# Altium PCB MergeRev4_0.PcbDoc
Units mil, origin at the board's own origin, x right, y up, seen from the top; angles counter-clockwise.
Board outline 6000 x 4000 mil, 2 copper layers (Top Layer, Bottom Layer); 45 components, 44 nets, 278 pads, 14 vias.
Unrouted connection lines stored in the file: 140.
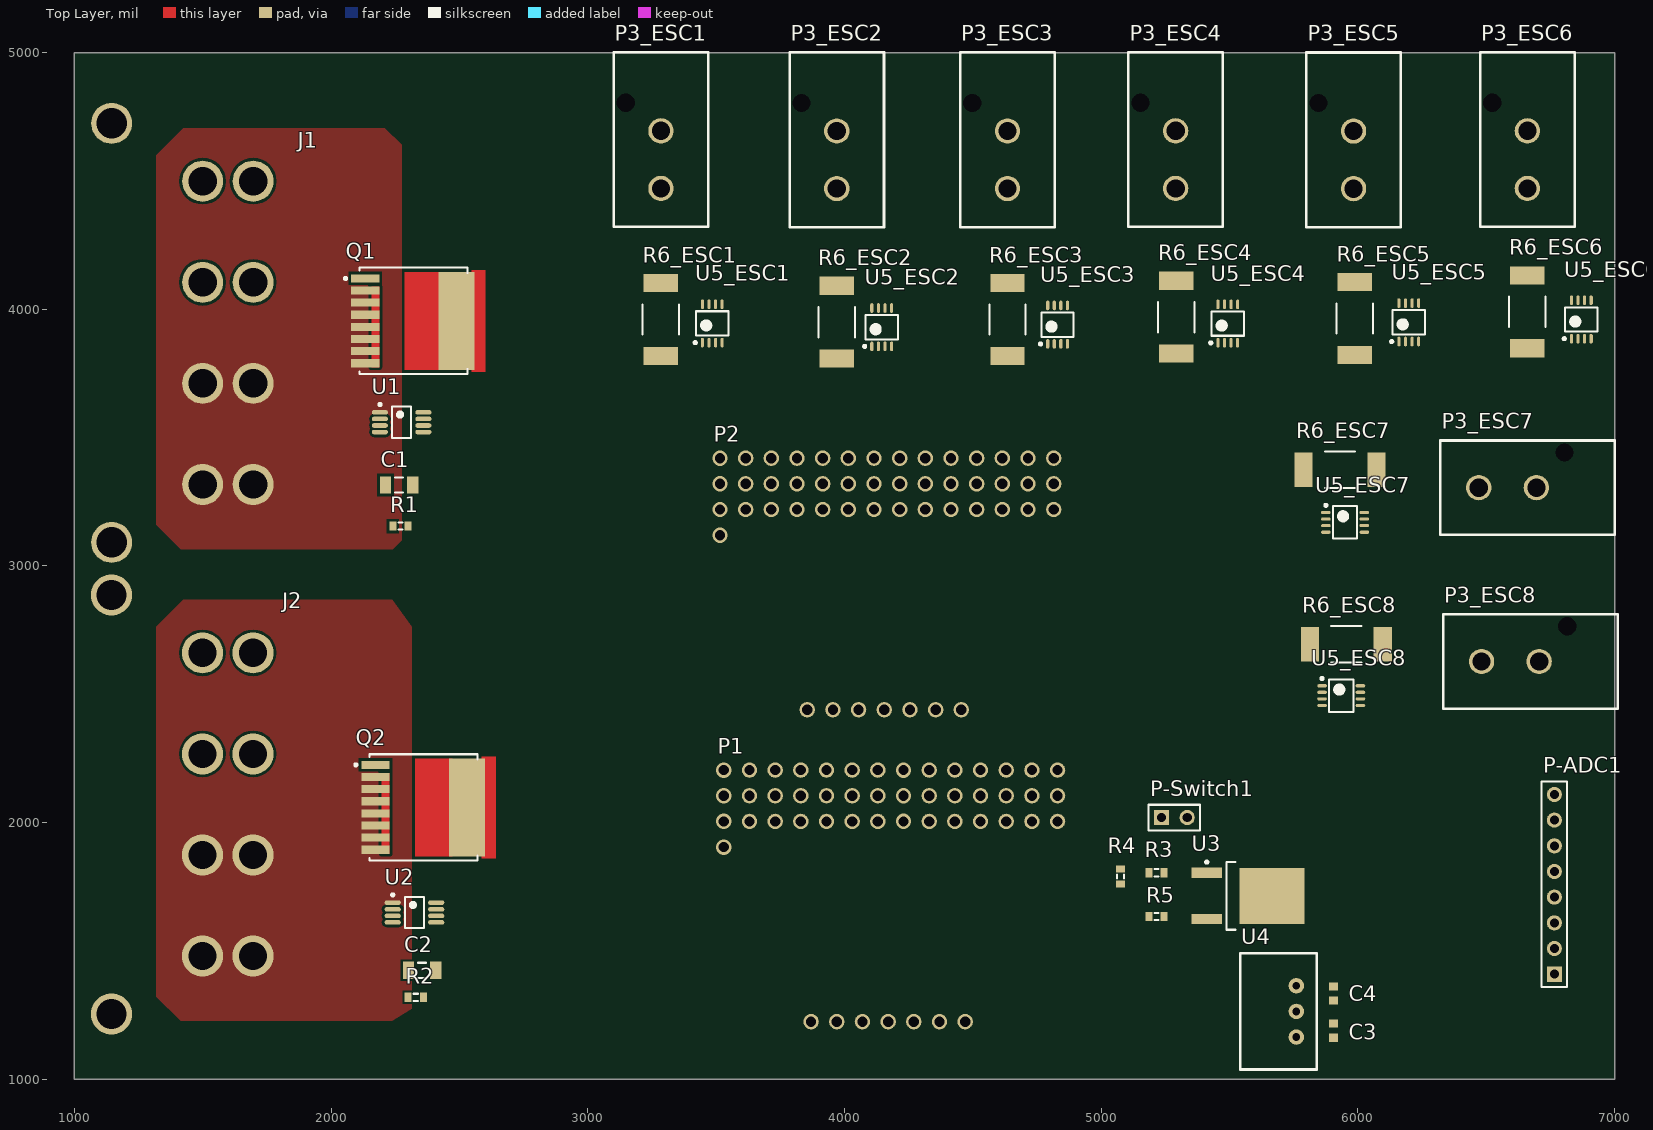
[diagram p0: Top Layer view]
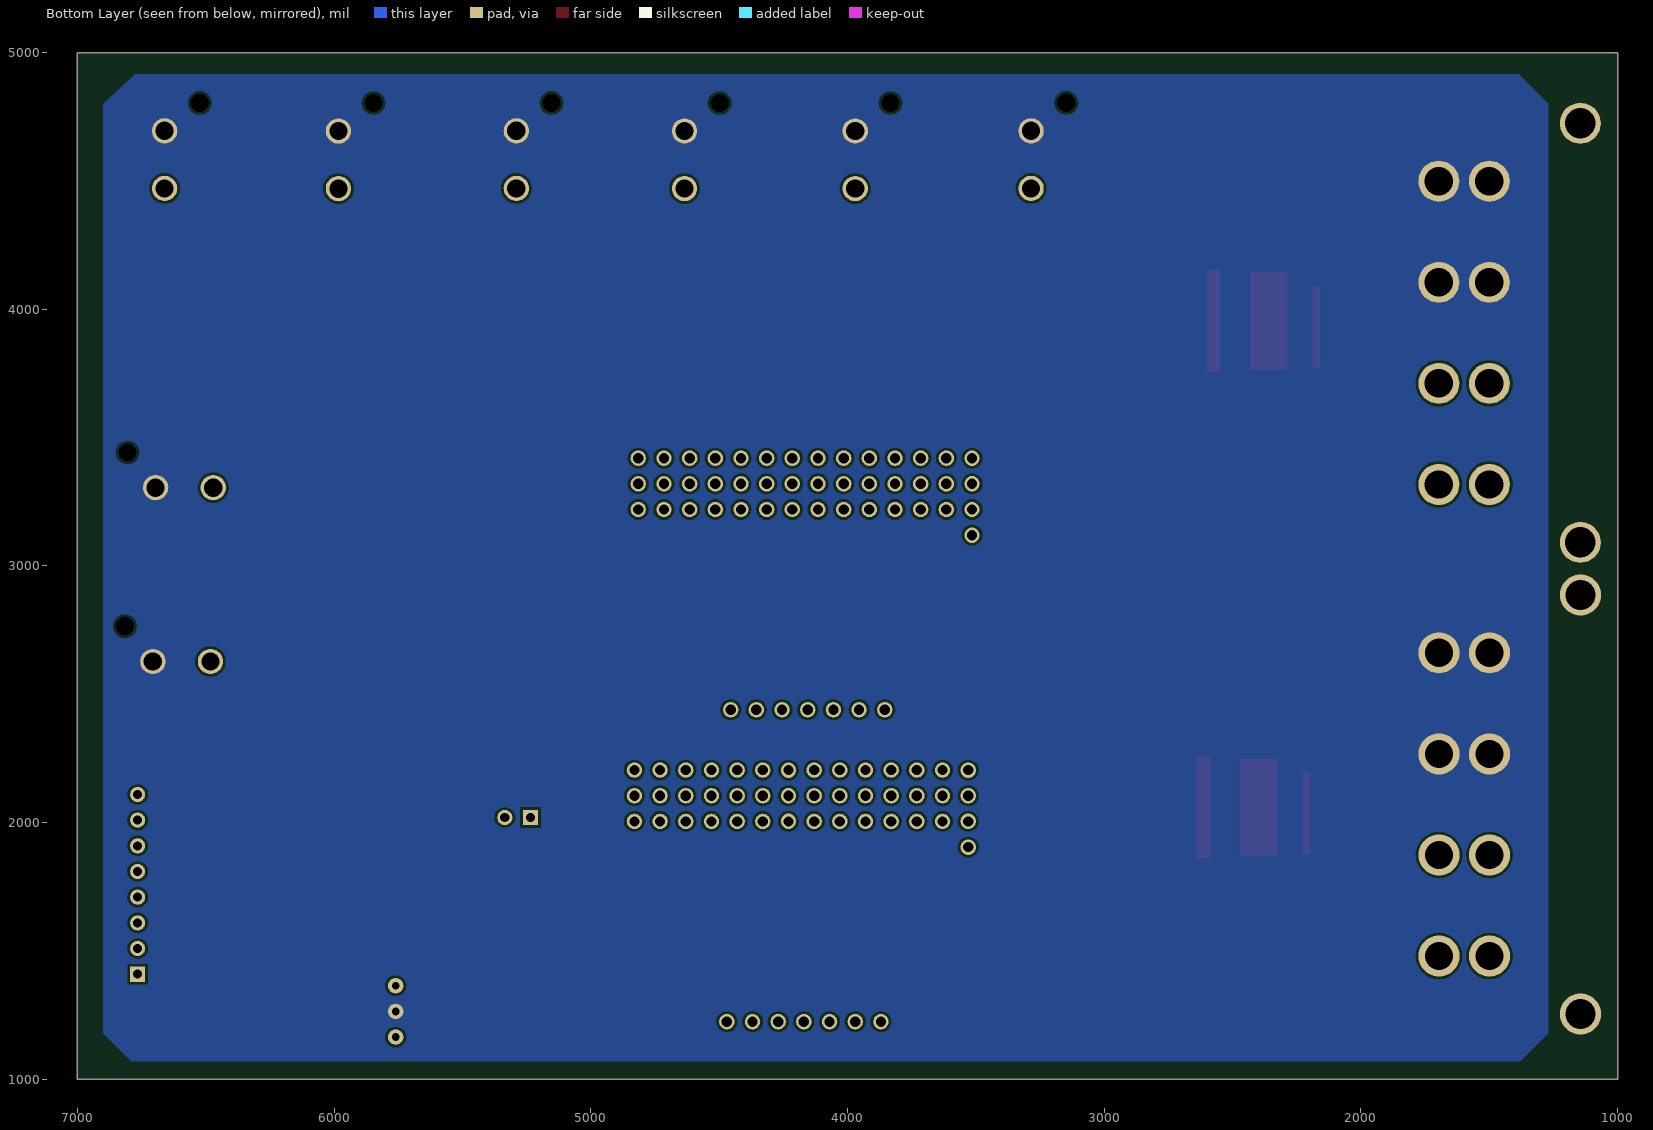
[diagram p1: Bottom Layer view, seen from below]

## Layer stack, top to bottom
Top Solder: solder mask 0.4, Solder Resist, Dk 3.5
Top Layer: signal copper 1.4
Dielectric 1: dielectric 12.6, FR-4, Dk 4.8
Bottom Layer: signal copper 1.4
Bottom Solder: solder mask 0.4, Solder Resist, Dk 3.5

## Board outline
1000,1000 7000,1000 7000,5000 1000,5000

## Design rules (kind name [scope] priority, off if disabled: settings)
Clearance [All] p1: gap=10 ignorepadtopadclearanceinfootprint=FALSE except(0: Arc-Hole Track-Hole SMDPad-Hole THPad-Hole Via-Hole Fill-Hole Poly-Hole Region-Hole Text-Hole)
PolygonConnect PolygonConnect_5 [All vs IsNamedPolygon('Ground Pour')] p1: thpad.connectstyle=Direct thpad.reliefconductorwidth=10 thpad.reliefentries=4 thpad.polygonreliefangle="90 Angle" thpad.airgapwidth=10 smdpad.connectstyle=Direct smdpad.reliefconductorwidth=10 smdpad.reliefentries=4 smdpad.polygonreliefangle="90 Angle" smdpad.airgapwidth=10 via.connectstyle=Relief via.reliefconductorwidth=10 via.reliefentries=4 via.polygonreliefangle="90 Angle" via.airgapwidth=10
PolygonConnect PolygonConnect_4 [All vs IsNamedPolygon('Ground Pour')] p2: thpad.connectstyle=Direct thpad.reliefconductorwidth=10 thpad.reliefentries=4 thpad.polygonreliefangle="90 Angle" thpad.airgapwidth=10 smdpad.connectstyle=Direct smdpad.reliefconductorwidth=10 smdpad.reliefentries=4 smdpad.polygonreliefangle="90 Angle" smdpad.airgapwidth=10 via.connectstyle=Relief via.reliefconductorwidth=10 via.reliefentries=4 via.polygonreliefangle="90 Angle" via.airgapwidth=10
PolygonConnect PolygonConnect_3 [All vs IsNamedPolygon('Top Layer-No Net')] p3: thpad.connectstyle=Direct thpad.reliefconductorwidth=10 thpad.reliefentries=4 thpad.polygonreliefangle="90 Angle" thpad.airgapwidth=10 smdpad.connectstyle=Direct smdpad.reliefconductorwidth=10 smdpad.reliefentries=4 smdpad.polygonreliefangle="90 Angle" smdpad.airgapwidth=10 via.connectstyle=Relief via.reliefconductorwidth=10 via.reliefentries=4 via.polygonreliefangle="90 Angle" via.airgapwidth=10
PolygonConnect PolygonConnect_2 [All vs IsNamedPolygon('Top Layer-No Net')] p4: thpad.connectstyle=Direct thpad.reliefconductorwidth=10 thpad.reliefentries=4 thpad.polygonreliefangle="90 Angle" thpad.airgapwidth=10 smdpad.connectstyle=Direct smdpad.reliefconductorwidth=10 smdpad.reliefentries=4 smdpad.polygonreliefangle="90 Angle" smdpad.airgapwidth=10 via.connectstyle=Relief via.reliefconductorwidth=10 via.reliefentries=4 via.polygonreliefangle="90 Angle" via.airgapwidth=10
PolygonConnect PolygonConnect_1 [All vs IsNamedPolygon('Top Layer-No Net')] p5: thpad.connectstyle=Relief thpad.reliefconductorwidth=10 thpad.reliefentries=4 thpad.polygonreliefangle="90 Angle" thpad.airgapwidth=10 smdpad.connectstyle=Direct smdpad.reliefconductorwidth=10 smdpad.reliefentries=4 smdpad.polygonreliefangle="90 Angle" smdpad.airgapwidth=10 via.connectstyle=Relief via.reliefconductorwidth=10 via.reliefentries=4 via.polygonreliefangle="90 Angle" via.airgapwidth=10
PolygonConnect [All] p6: connectstyle=Relief reliefconductorwidth=10 reliefentries=4 polygonreliefangle="90 Angle" airgapwidth=10
RoutingVias [All] p1: holewidth=28 width=50 viastyle="Through Hole" minholewidth=28 minwidth=50 maxholewidth=28 maxwidth=50
SolderMaskExpansion [All] p1: expansion=4
Width [All] p1: maxlimit=10 minlimit=10 preferedwidth=10
30 further rules are at their usual default settings.

## Classes and differential pairs
channel class ESCHeaders: ESC1 ESC2 ESC3 ESC4 ESC5 ESC6 ESC7 ESC8
component class ESC8: P3_ESC8 R6_ESC8 U5_ESC8
component class ESC7: P3_ESC7 R6_ESC7 U5_ESC7
component class ESC6: P3_ESC6 R6_ESC6 U5_ESC6
component class ESC5: P3_ESC5 R6_ESC5 U5_ESC5
component class ESC4: P3_ESC4 R6_ESC4 U5_ESC4
component class ESC3: P3_ESC3 R6_ESC3 U5_ESC3
component class ESC2: P3_ESC2 R6_ESC2 U5_ESC2
net class ADC[1..8]: ADC1 ADC2 ADC3 ADC4 ADC5 ADC6 ADC7 ADC8
component class ESC1: P3_ESC1 R6_ESC1 U5_ESC1
component class MergeRev4_0: C1 C2 C3 C4 J1 J2 P1 P2 P-ADC1 P-Switch1 Q1 Q2 R1 R2 R3 R4 R5 U1 U2 U3 U4

## Components (designator, comment, footprint, x,y, rotation, side; value= is the part's Value field where it differs from the comment)
C1 "Cap Semi" C1206 2265,3315 r0 top value=1uF
C2 "Cap Semi" C1206 2355,1425 r0 top value=1uF
C3 "Cap" 1608[0603] 5905,1190 r270 top value=100pF
C4 "Cap" 1608[0603] 5905,1335 r90 top value=100pF
J1 "Molex42820-4224" Molex42820-4224 1500,4498.7 r270 top
J2 "Molex42820-4224" Molex42820-4224 1499.33,2661.69 r270 top
P1 "Pololu Headers" "Pololu Headers" 4630,2105 r270 top
P2 "ESC Headers" "Pololu Headers" 4615,3320 r270 top
P3_ESC1 "Megafit Slim Vert 2 Peg" 76829-0102 3101.14,4320.59 r0 top (schematic designator P3)
P3_ESC2 "Megafit Slim Vert 2 Peg" 76829-0102 3786.14,4320 r0 top (schematic designator P3)
P3_ESC3 "Megafit Slim Vert 2 Peg" 76829-0102 4451.14,4320 r0 top (schematic designator P3)
P3_ESC4 "Megafit Slim Vert 2 Peg" 76829-0102 5106.14,4320.59 r0 top (schematic designator P3)
P3_ESC5 "Megafit Slim Vert 2 Peg" 76829-0102 5799.13,4319.65 r0 top (schematic designator P3)
P3_ESC6 "Megafit Slim Vert 2 Peg" 76829-0102 6476.14,4320.59 r0 top (schematic designator P3)
P3_ESC7 "Megafit Slim Vert 2 Peg" 76829-0102 6320.59,3488.86 r270 top (schematic designator P3)
P3_ESC8 "Megafit Slim Vert 2 Peg" 76829-0102 6331.54,2811.85 r270 top (schematic designator P3)
P-ADC1 "Header 8" HDR1X8 6765,1410 r90 top
P-Switch1 "Header 2" HDR1X2 5235,2020 r0 top
Q1 "IPT004N03L" INF-PG-HSOF-8-1_V 2340,3955 r0 top
Q2 "IPT004N03L" INF-PG-HSOF-8-1_V 2380,2060 r0 top
R1 "Res3" J1-0603 2270.47,3155 r0 top value=100Ohm
R2 "Res3" J1-0603 2330,1320 r0 top value=100Ohm
R3 "Res3" J1-0603 5215,1805 r0 top value=1K
R4 "Res3" J1-0603 5075,1790.47 r90 top value=100K
R5 "Res3" J1-0603 5215,1635 r0 top value=1K
R6_ESC1 "HCS2512" HCS2512FTL300CT-ND_DT 3285,3960 r90 top value=0.0003 (schematic designator R6)
R6_ESC2 "HCS2512" HCS2512FTL300CT-ND_DT 3970,3950 r90 top value=0.0003 (schematic designator R6)
R6_ESC3 "HCS2512" HCS2512FTL300CT-ND_DT 4635,3960 r90 top value=0.0003 (schematic designator R6)
R6_ESC4 "HCS2512" HCS2512FTL300CT-ND_DT 5292.99,3969.06 r90 top value=0.0003 (schematic designator R6)
R6_ESC5 "HCS2512" HCS2512FTL300CT-ND_DT 5987.99,3964.06 r90 top value=0.0003 (schematic designator R6)
R6_ESC6 "HCS2512" HCS2512FTL300CT-ND_DT 6660,3990 r90 top value=0.0003 (schematic designator R6)
R6_ESC7 "HCS2512" HCS2512FTL300CT-ND_DT 5930,3375 r0 top value=0.0003 (schematic designator R6)
R6_ESC8 "HCS2512" HCS2512FTL300CT-ND_DT 5955,2695 r0 top value=0.0003 (schematic designator R6)
U1 "LTC4357CMS8#PBF" LT-MS8-8_N 2275,3560 r0 top
U2 "LTC4357CMS8#PBF" LT-MS8-8_N 2325,1650 r0 top
U3 "IRLR6225TRPBFCT-ND" IRLR6225_DT 5572.48,1715 r0 top
U4 "R-78XX-1.0" R-785.0-1.0 5838.74,1038.62 r90 top
U5_ESC1 "AD8217" AD8217_DT 3485,3945 r90 top (schematic designator U5)
U5_ESC2 "AD8217" AD8217_DT 4145,3930 r90 top (schematic designator U5)
U5_ESC3 "AD8217" AD8217_DT 4830,3940 r90 top (schematic designator U5)
U5_ESC4 "AD8217" AD8217_DT 5492.99,3944.06 r90 top (schematic designator U5)
U5_ESC5 "AD8217" AD8217_DT 6197.99,3949.06 r90 top (schematic designator U5)
U5_ESC6 "AD8217" AD8217_DT 6870,3960 r90 top (schematic designator U5)
U5_ESC7 "AD8217" AD8217_DT 5950,3170 r0 top (schematic designator U5)
U5_ESC8 "AD8217" AD8217_DT 5935,2495 r0 top (schematic designator U5)

## Footprints (in the part's own frame and the unit in brackets; to place one, negate y for a bottom-side part, rotate by r counter-clockwise, add the part's x,y. Pads: shape width x height; smd on the part's side, far side on the other; paste and mask are expansions set on the pad)
1608[0603] [mm] "Chip Capacitor, Body 1.6x0.8mm, IPC High Density"
  rect 0.8x0.9 smd: 1(-0.7,0) 2(0.7,0)
  body extent -0.87,-0.48 0.87,0.48, height 1.3
76829-0102 [mm] "molex 2 circuit connector megafit slim"
  round 2.5 hole 1.8 mask+0.3: 1(4.67,3.81) 2(4.67,9.51)
  round 0 hole 1.8 unplated: ""(1.19,12.28)
  silkscreen extent 0,0 9.34,17.28, body extent 0.5,0.5 8.85,14.54, height 16.95
AD8217_DT [mm] "MSOP, 8-Leads, 3.00mm x 3.00mm"
  oval 0.95x0.32 smd: 1(-1.9,0.975) 2(-1.9,0.325) 3(-1.9,-0.325) 4(-1.9,-0.975) 5(1.9,-0.975) 6(1.9,-0.325) 7(1.9,0.325) 8(1.9,0.975)
  silkscreen extent -2.02,-1.6 1.2,1.81, body extent -1.6,-1.6 1.6,1.6, height 1.1
C1206 [mm] "Chip Capacitor, Body 3.2x1.6mm, IPC High Density"
  rect 1.1x1.7 smd: 1(-1.35,0) 2(1.35,0)
  silkscreen extent -0.4,-0.75 0.4,0.75, body extent -1.7,-0.9 1.7,0.9, height 1.3
HCS2512FTL300CT-ND_DT [mm] "Molded Capacitor, 2-Leads, Body 6.50 x 3.25mm, IPC Medium Density"
  rect 1.8x3.4 smd: 1(-3.6,0) 2(3.6,0)
  silkscreen extent -1.5,-1.8 1.5,1.8, body extent -3.35,-1.78 3.35,1.78, height 0.91
HDR1X2 [mm] "Connector; Header; 2 Position"
  rect 1.5x1.5 hole 0.9: 1(0,0)
  round 1.5 hole 0.9: 2(2.54,0)
  silkscreen extent -1.27,-1.27 3.81,1.27
HDR1X8 [mm] "Connector; Header; 8 Position"
  rect 1.5x1.5 hole 0.9: 1(0,0)
  round 1.5 hole 0.9: 2(2.54,0) 3(5.08,0) 4(7.62,0) 5(10.16,0) 6(12.7,0) 7(15.24,0) 8(17.78,0)
  silkscreen extent -1.27,-1.27 19.05,1.27
INF-PG-HSOF-8-1_V [mm]
  rect 2.8x0.8 smd: 1(-5.249,4.2) 2(-5.249,3) 3(-5.249,1.8) 4(-5.249,0.6) 5(-5.249,-0.6) 6(-5.249,-1.8) 7(-5.249,-3) 8(-5.249,-4.2)
  rect 3.556x9.703 smd: 9(3.8,0)
  Top Layer region: -1.35,4.85 -1.35,-4.85 2.35,-4.85 2.35,4.85
  Top Layer region: 5.25,5.05 5.25,-5.05 6.65,-5.05 6.65,5.05
  Top Layer region: -4.65,3.4 -4.65,-4.6 -3.85,-4.6 -3.85,3.4
  silkscreen extent -7.32,-5.25 4.85,5.25, body extent -5.84,-4.95 5.84,4.95, height 2.4
IRLR6225_DT [mm] "D-PAK, 3-Pads, Body 6.21x6.73mm (max), IPC Medium Density"
  rect 3x1 smd: 1(-4.1,2.29) 3(-4.1,-2.29)
  rect 6.4x5.55 smd: 4(2.35,0)
  silkscreen extent -4.22,-3.35 -1.25,3.46, body extent -2.15,-3.37 4.07,3.37, height 2.39
J1-0603 [mm] "Chip Resistor, Body 1.6x0.8mm, IPC High Density"
  rect 0.7x0.9 smd: 1(-0.75,0) 2(0.75,0)
  silkscreen extent -0.2,-0.35 0.2,0.35, body extent -0.85,-0.48 0.85,0.48, height 0.9
LT-MS8-8_N [mm]
  oval 1.6x0.45 smd: 1(-2.15,0.975) 2(-2.15,0.325) 3(-2.15,-0.325) 4(-2.15,-0.975) 5(2.15,-0.975) 6(2.15,-0.325) 7(2.15,0.325) 8(2.15,0.975)
  silkscreen extent -2.27,-1.55 0.95,1.87, body extent -1.55,-1.55 1.55,1.55, height 1.1
Molex42820-4224 [mm] "Molex42820-4224"
  round 4.064 hole 2.8: 1(0,5) 1(0,0) 2(10,5) 2(10,0) 3(20,0) 3(20,5) 4(30,0) 4(30,5)
  round 4.064 hole 3 unplated: ""(-5.73,-9) ""(35.73,-9)
  body extent -6.92,-22.62 36.9,5.98, height 15
"Pololu Headers" [mil]
  round 60 hole 40: 0(-100,200) 1(0,200) 2(100,200) 3(-100,100) 4(0,100) 5(100,100) 6(-100,0) 7(0,0) 8(100,0) 9(-100,-100) 10(0,-100) 11(100,-100) 12(-100,-200) 13(0,-200) 14(100,-200) 15(-100,-300) 16(0,-300) 17(100,-300) 18(-100,-500) 19(0,-500) 20(100,-500) 21(-100,-600) 22(0,-600) 23(100,-600) 24(-100,-700) 25(0,-700) 26(100,-700) 27(-100,-800) 28(0,-800) 29(100,-800) 30(-100,-900) 31(0,-900) 32(100,-900) 33(-100,-1000) 34(0,-1000) 35(100,-1000) 36(880,-160) 37(880,-260) 38(880,-360) 39(880,-460) 40(880,-560) 41(880,-660) 42(880,-760)
R-785.0-1.0 [mil]
  round 60 hole 30: 1(126.38,78.74) 2(226.38,78.74) 3(326.38,78.74)
  silkscreen extent 0,0 453,297

## Part data
C1 C2: "Capacitor (Semiconductor SIM Model)", LatestRevisionDate=29-May-2009, LatestRevisionNote="IPC-7351 Footprint Added.", PackageDescription="Chip Capacitor", PackageReference=C1206, Published=8-Jun-2000, Publisher="Altium Limited"
C3 C4: "Capacitor", LatestRevisionDate=17-Jul-2002, LatestRevisionNote="Re-released for DXP Platform.", PackageDescription="Radial Cap, Thru-Hole; 2 Leads; 0.3 in Pin Spacing", PackageReference=RAD-0.3, Published=8-Jun-2000, Publisher="Altium Limited"
J1 J2: Supplier Part Number 1=0428204224-ND, ComponentLink1Description=DataSheet, ComponentLink1URL=https://www.molex.com/pdm_docs/sd/428204224_sd.pdf, Supplier 1=Digi-Key
P2: library part "Pololu Headers"
P-ADC1: "Header, 8-Pin", LatestRevisionDate=17-Jul-2002, LatestRevisionNote="Re-released for DXP Platform.", Publisher="Altium Limited"
P-Switch1: "Header, 2-Pin", LatestRevisionDate=17-Jul-2002, LatestRevisionNote="Re-released for DXP Platform.", Publisher="Altium Limited"
Q1 Q2: "N-Channel OptiMOS(TM) Power-MOSFET, 30 V VDS, 300 A ID, -55 to 175 degC, PG-HSOF-8, Reel, Green", Manufacturer=Infineon, Supplier Part Number 1=N/A, ComponentLink1Description="Manufacturer URL", ComponentLink1URL=http://www.infineon.com/, ComponentLink2Description=Datasheet, ComponentLink2URL=http://www.infineon.com/dgdl/IPT004N03L_rev1.2.pdf?folderId=db3a304313b8b5a60113cee8763b02d7&fileId=db3a30433e9d5d11013e9e0f382600c2, ComponentLink3Description="Package Specification", ComponentLink3URL=http://www.infineon.com/cms/packages/SMD_-_Surface_Mounted_Devices/P-PG-HSOF/P-PG-HSOF-08-1.html?__locale=en, DatasheetVersion="Rev. 1.2", Green=TRUE, Halogen-free=TRUE, ID (max)="300 A", IDpuls (max)="1,200 A", Mounting Technology="Surface Mount", PackageDescription="8-Pin Plastic (Green) Heatlink Small Outline Flat Leads Package, 10.375 x 9.9 mm Body, 0.8 mm Pitch", PackageReference=PG-HSOF-8-1, PackageVersion="Rev. 04", Packing=Reel, PartNumber=IPT004N03L, Polarity=FALSE, Ptot (max)="300 W", QG="122 nC", RDS (on) (max)="0.4 mOhm", RthJA (max)="40 K/W", RthJC (max)="0.5 K/W", Supplier 1=Mouser, Technology=OptiMOS(TM), VDS (max)="30 V", VGS(th) (max)="2.2 V", VGS(th) (min)="0.7 V"
R1 R2 R3 R4 R5: "Resistor", LatestRevisionDate=29-May-2009, LatestRevisionNote="IPC-7351 Footprint Added.", PackageDescription="Chip Resistor", PackageReference=J1-0603, Published=8-Jun-2000, Publisher="Altium Limited"
R6_ESC1 R6_ESC2 R6_ESC3 R6_ESC4 R6_ESC5 R6_ESC6 R6_ESC7 R6_ESC8: library part Res3, "Resistor", LatestRevisionDate=29-May-2009, LatestRevisionNote="IPC-7351 Footprint Added.", mfgr_part_num=HCS2512FTL300, PackageDescription="Chip Resistor", PackageReference=J1-0603, Published=8-Jun-2000, Publisher="Altium Limited"
U1 U2: "Positive High Voltage Ideal Diode Controller, 9 to 80 V Vin, 8-pin SOP (MS8-8), 0 to 70 degC, Pb-Free", Manufacturer="Linear Technology", Supplier Part Number 1=LTC4357CMS8#PBF-ND, ComponentLink1Description="Manufacturer URL", ComponentLink1URL=http://www.linear.com/, ComponentLink2Description=Datasheet, ComponentLink2URL=http://cds.linear.com/docs/en/datasheet/4357fd.pdf, ComponentLink3Description="Package Specification", ComponentLink3URL=http://cds.linear.com/docs/en/packaging/05081660_G_MS8.pdf, DatasheetVersion="Rev. D", Ideal Diode="Single, External, N-Channel", Mounting Technology="Surface Mount", PackageDescription="8-Pin Plastic MSOP, Body 3 x 3 mm, Pitch 0.65 mm", PackageReference=MS8-8, PackageVersion="Rev. G, 03/2012", PartNumber=LTC4357CMS8#PBF, RoHS=TRUE, Supplier 1=Digi-Key, Supplier 2=Farnell, Supplier 3=Newark, Supplier Part Number 2=1432779, Supplier Part Number 3=56M9468
P3_ESC1 P3_ESC2 P3_ESC3 P3_ESC4 P3_ESC5 P3_ESC6 P3_ESC7 P3_ESC8: mfgr_part_num=76829-0102
U3: mnfr_part_num=IRLR6225TRPBFCT-ND
U5_ESC1 U5_ESC2 U5_ESC3 U5_ESC4 U5_ESC5 U5_ESC6 U5_ESC7 U5_ESC8: mfgr_part_num=AD8217BRMZ-R7

## Via types
v1: diameter 60, hole 40, Top Layer to Bottom Layer, 14 vias

## Nets (pads, with @x,y where several pads share a name; then routed paths per layer and width w, separated by ;. In a path a pad name is that pad's centre, name@x,y a point inside that pad or via, vN(x,y) a via of type N, cw(c..) or ccw(c..) an arc to the next point about the centre after c; other vN are vias at no path point)
ADC1: P-ADC1.1 U5_ESC1.5
ADC2: P-ADC1.2 U5_ESC2.5
ADC3: P-ADC1.3 U5_ESC3.5
ADC4: P-ADC1.4 U5_ESC4.5
ADC5: P-ADC1.5 U5_ESC5.5
ADC6: P-ADC1.6 U5_ESC6.5
ADC7: P-ADC1.7 U5_ESC7.5
ADC8: P-ADC1.8 U5_ESC8.5
GND: C1.1 C2.1 C3.1 C4.1 J1.1 J1.2 J2.1 J2.2 P3_ESC1.2 P3_ESC2.2 P3_ESC3.2 P3_ESC4.2 P3_ESC5.2 P3_ESC6.2 P3_ESC7.2 P3_ESC8.2 R4.1 U1.2 U1.3 U1.5 U1.6 U2.2 U2.3 U2.5 U2.6 U4.2 U5_ESC1.4 U5_ESC2.4 U5_ESC3.4 U5_ESC4.4 U5_ESC5.4 U5_ESC6.4 U5_ESC7.4 U5_ESC8.4
NetC1_2: C1.2 R1.1 U1.7
NetC2_2: C2.2 R2.1 U2.7
NetC4_2: C4.2 P-Switch1.2 U4.3
NetJ1_3: J1.3 J1.4 Q1.2 Q1.3 Q1.4 Q1.5 Q1.6 Q1.7 Q1.8 U1.1
NetJ2_3: J2.3 J2.4 Q2.2 Q2.3 Q2.4 Q2.5 Q2.6 Q2.7 Q2.8 U2.1
NetP1_0: P1.0 P2.0
NetP1_1: P1.1 P1.4 P1.7 P1.10 P1.13 P1.16 P1.19 P1.22 P1.25 P1.28 P1.31 P1.34 P2.1 P2.4 P2.7 P2.10 P2.13 P2.16 P2.19 P2.22 P2.25 P2.28 P2.31 P2.34
NetP1_2: P1.2 P1.5 P1.8 P1.11 P1.14 P1.17 P1.20 P1.23 P1.26 P1.29 P1.32 P1.35 P2.2 P2.5 P2.8 P2.11 P2.14 P2.17 P2.20 P2.23 P2.26 P2.29 P2.32 P2.35
NetP1_3: P1.3 P2.3
NetP1_6: P1.6 P2.6
NetP1_9: P1.9 P2.9
NetP1_12: P1.12 P2.12
NetP1_15: P1.15 P2.15
NetP1_18: P1.18 P2.18
NetP1_21: P1.21 P2.21
NetP1_24: P1.24 P2.24
NetP1_27: P1.27 P2.27
NetP1_30: P1.30 P2.30
NetP1_33: P1.33 P2.33
NetP1_36: P1.36 R5.1
NetP1_40: P1.40 U3.4
NetP3_ESC1_1: P3_ESC1.1 R6_ESC1.2 U5_ESC1.8
NetP3_ESC2_1: P3_ESC2.1 R6_ESC2.2 U5_ESC2.8
NetP3_ESC3_1: P3_ESC3.1 R6_ESC3.2 U5_ESC3.8
NetP3_ESC4_1: P3_ESC4.1 R6_ESC4.2 U5_ESC4.8
NetP3_ESC5_1: P3_ESC5.1 R6_ESC5.2 U5_ESC5.8
NetP3_ESC6_1: P3_ESC6.1 R6_ESC6.2 U5_ESC6.8
NetP3_ESC7_1: P3_ESC7.1 R6_ESC7.2 U5_ESC7.8
NetP3_ESC8_1: P3_ESC8.1 R6_ESC8.2 U5_ESC8.8
NetP-Switch1_1: P-Switch1.1 R3.1 R4.2
NetQ1_1: Q1.1 U1.4
NetQ2_1: Q2.1 U2.4
NetR3_2: R3.2 U3.1
NetR5_2: R5.2 U3.3
VCC: C3.2 Q1.9 Q2.9 R1.2 R2.2 R6_ESC1.1 R6_ESC2.1 R6_ESC3.1 R6_ESC4.1 R6_ESC5.1 R6_ESC6.1 R6_ESC7.1 R6_ESC8.1 U1.8 U2.8 U4.1 U5_ESC1.1 U5_ESC2.1 U5_ESC3.1 U5_ESC4.1 U5_ESC5.1 U5_ESC6.1 U5_ESC7.1 U5_ESC8.1
pads on no net: J1. J2. P1.37 P1.38 P1.39 P1.41 P1.42 P2.36 P2.37 P2.38 P2.39 P2.40 P2.41 P2.42 P3_ESC1. P3_ESC2. P3_ESC3. P3_ESC4. P3_ESC5. P3_ESC6. P3_ESC7. P3_ESC8. U5_ESC1.2 U5_ESC1.3 U5_ESC1.6 U5_ESC1.7 U5_ESC2.2 U5_ESC2.3 U5_ESC2.6 U5_ESC2.7 U5_ESC3.2 U5_ESC3.3 U5_ESC3.6 U5_ESC3.7 U5_ESC4.2 U5_ESC4.3 U5_ESC4.6 U5_ESC4.7 U5_ESC5.2 U5_ESC5.3 U5_ESC5.6 U5_ESC5.7 U5_ESC6.2 U5_ESC6.3 U5_ESC6.6 U5_ESC6.7 U5_ESC7.2 U5_ESC7.3 U5_ESC7.6 U5_ESC7.7 U5_ESC8.2 U5_ESC8.3 U5_ESC8.6 U5_ESC8.7
copper on no net:
  other v1: 3530,1905 3530,2005 4230,2005 3530,2105 4230,2105 3530,2205 4230,2205 3515,3120 3515,3220 4215,3220 3515,3320 4215,3320 3515,3420 4215,3420

## Polygon pours and split planes (outlines as drawn)
NetJ2_3 on Top Layer "Top Layer-No Net" (solid, pour order 10): 2315,2762.32 2239.33,2867.99 1424.33,2867.99 1319.33,2762.99 1319.33,1322.99 1414.33,1227.99 2239.33,1227.99 2315,1275
NetJ1_3 on Top Layer "Top Layer-No Net" (solid, pour order 8): 2275,4640 2210,4705 1425,4705 1320,4600 1320,3160 1415,3065 2240,3065 2275,3100
GND on Bottom Layer "Ground Pour" (solid, pour order 14): 1385,4915 1270,4800 1270,1180 1380,1070 6790,1070 6900,1180 6900,4800 6775,4915